# EAGLE board TPL0501 (EAGLE 6.4)
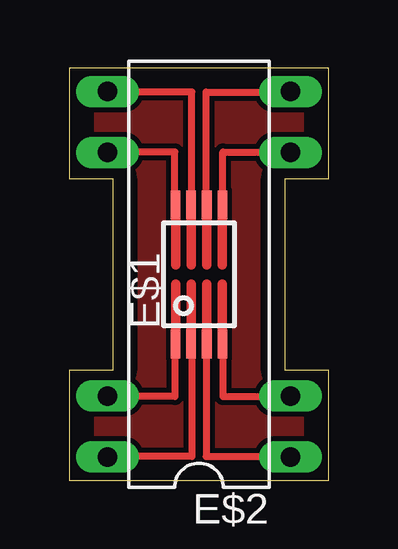
[diagram p0: board, top side]

Size 10.8 x 17.2 mm. Coordinates in mm from the lower left corner, seen from the top.
Outline: 0,0 10.8,0 10.8,4.6 9,4.6 9,12.6 10.8,12.6 10.8,17.2 0,17.2 0,12.6 1.8,12.6 1.8,4.6 0,4.6 0,0
Copper layers (1*16): Top 0.035mm / dielectric 1.5mm / Bottom 0.035mm
Design rules "default": minimum track width 10mil, minimum drill 24mil, track to track 8mil, track to pad 8mil, pad to pad 8mil, via to via 8mil, smd to smd 8mil, copper to edge 40mil, drill to drill 8mil, minimum pad ring 10mil, minimum via ring 8mil, stop-mask expansion 4mil, vias tented up to drill 0mil, thermal gap 10mil

## Footprints (pad centres in the part's own frame; a part is rotated, then mirrored left to right if it is on the bottom)
R-PDSO-G08 = smd 0.4 x 1.2: 1 -0.975,-2.9; 2 -0.325,-2.9; 3 0.325,-2.9; 4 0.975,-2.9; 5 0.975,2.9; 6 0.325,2.9; 7 -0.325,2.9; 8 -0.975,2.9
DIL14/8 = drill 0.813 long: 1 -7.62,-3.81; 2 -5.08,-3.81; 6 5.08,-3.81; 7 7.62,-3.81; 8 7.62,3.81; 9 5.08,3.81; 13 -5.08,3.81; 14 -7.62,3.81

## Placement (x,y rotation side)
E$1  [R-PDSO-G08]  5.4,8.6 0 top
E$2  [DIL14/8]  5.4,8.6 90 top

## Library data of the parts
E$1 = ref-packages-longpad
E$2 = ref-packages

## Tracks (layer width: path | path; a pad name or v marks a point on that pad's centre or on a via)
1
  Top 0.3: 4.4,5.8 4.4,3.5 2.3,3.5
N$1
  pour Top: 2.8,13.1 2.8,11.7 3.9,11.7 3.9,13.1
N$2
  pour Top: 3.3,15.7 3.3,14.4 4.4,14.4 4.4,15.7
N$3
  pour Top: 6.5,15.7 6.5,14.3 7.6,14.3 7.6,15.7
N$4
  pour Top: 7,13.2 7,11.6 8,11.6 8,13.2
N$5
  pour Top: 2.8,5.3 2.8,4 4,4 4,5.3
N$6
  pour Top: 7,5.2 7,4.1 7.9,4.1 7.9,5.2
N$7
  pour Top: 3.7,2.4 3.7,1.6 4.5,1.6 4.5,2.4
N$8
  pour Top: 7.2,1.7 6.3,1.7 6.3,2.3 7.2,2.3
N$9
  pour Top: 0,17.4 10.8,17.2 10.8,12.6 9,12.6 9,4.6 10.8,4.6 10.8,0 0,0 0,4.6 1.8,4.6 1.8,12.6 0,12.6
S$1
  Top 0.3: 4.4,11.4 4.4,13.7 2.3,13.7
S$2
  Top 0.3: 5.1,11.4 5.1,16.2 2.1,16.2
S$3
  Top 0.3: 5.7,11.5 5.7,16.2 9,16.2
S$4
  Top 0.3: 6.4,11.4 6.4,13.7 8.4,13.7
S$5
  Top 0.3: 6.4,5.8 6.4,3.5 8.5,3.5
S$6
  Top 0.4: 4.42,11.2 4.42,9
S$7
  Top 0.3: 5.1,5.8 5.1,1 2,1
S$8
  Top 0.3: 5.7,5.8 5.7,1 8.8,1
S$9
  cutout Top: 4.02,8.84 6.78,8.84 6.78,8.32 4.02,8.32
S$10
  Top 0.4: 6.38,8.2 6.38,6.29
S$11
  Top 0.4: 4.42,8.21 4.42,6.29
S$12
  Top 0.4: 5.07,8.2 5.07,6.3
S$13
  Top 0.4: 5.73,8.2 5.73,6.29
S$14
  Top 0.4: 6.38,11.15 6.38,9
S$15
  Top 0.4: 5.73,11.15 5.73,9
S$16
  Top 0.4: 5.07,11.15 5.07,9

## Text on the board
tRestrict: L | S | H | D | W | C | + | -